# Altium PCB Audio_Docking_Station_PCB.PcbDoc
Units mm, origin at the board's own origin, x right, y up, seen from the top; angles counter-clockwise.
Board outline 70 x 100 mm, 2 copper layers (Top Layer, Bottom Layer); 31 components, 21 nets, 87 pads, 0 vias.
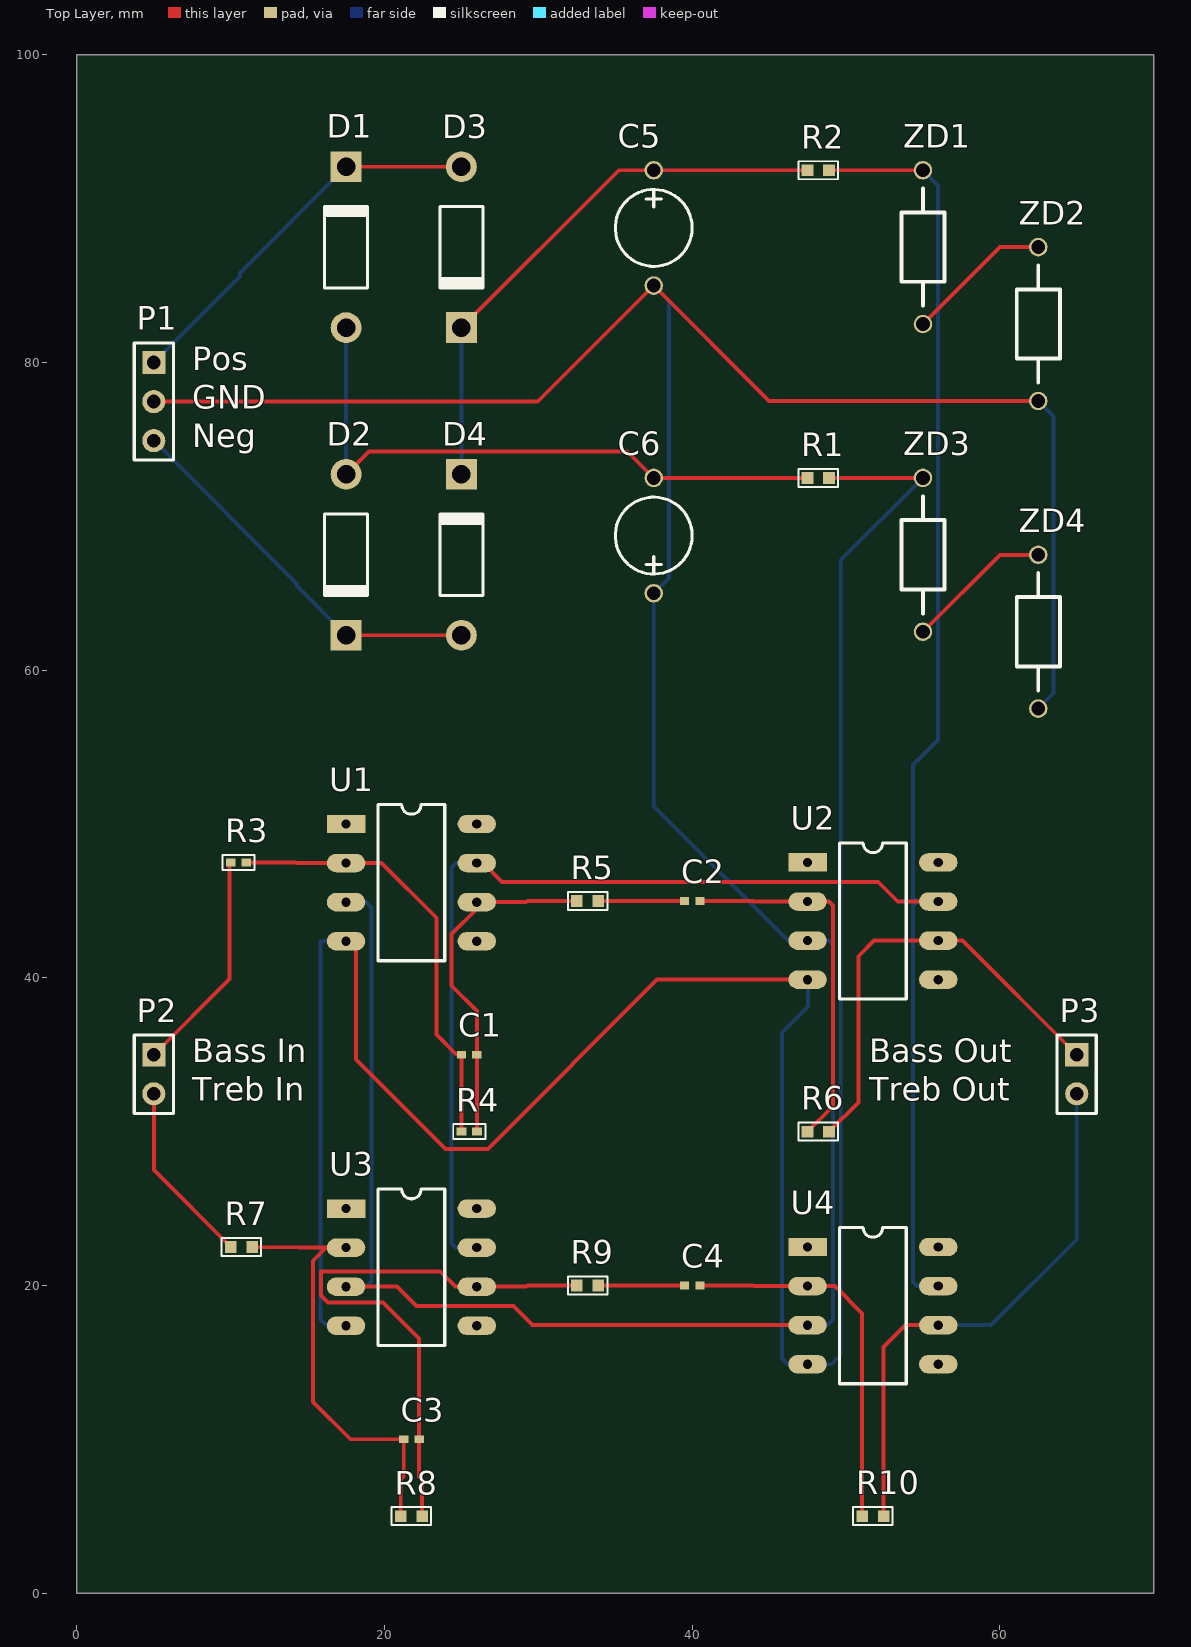
[diagram p0: Top Layer view]
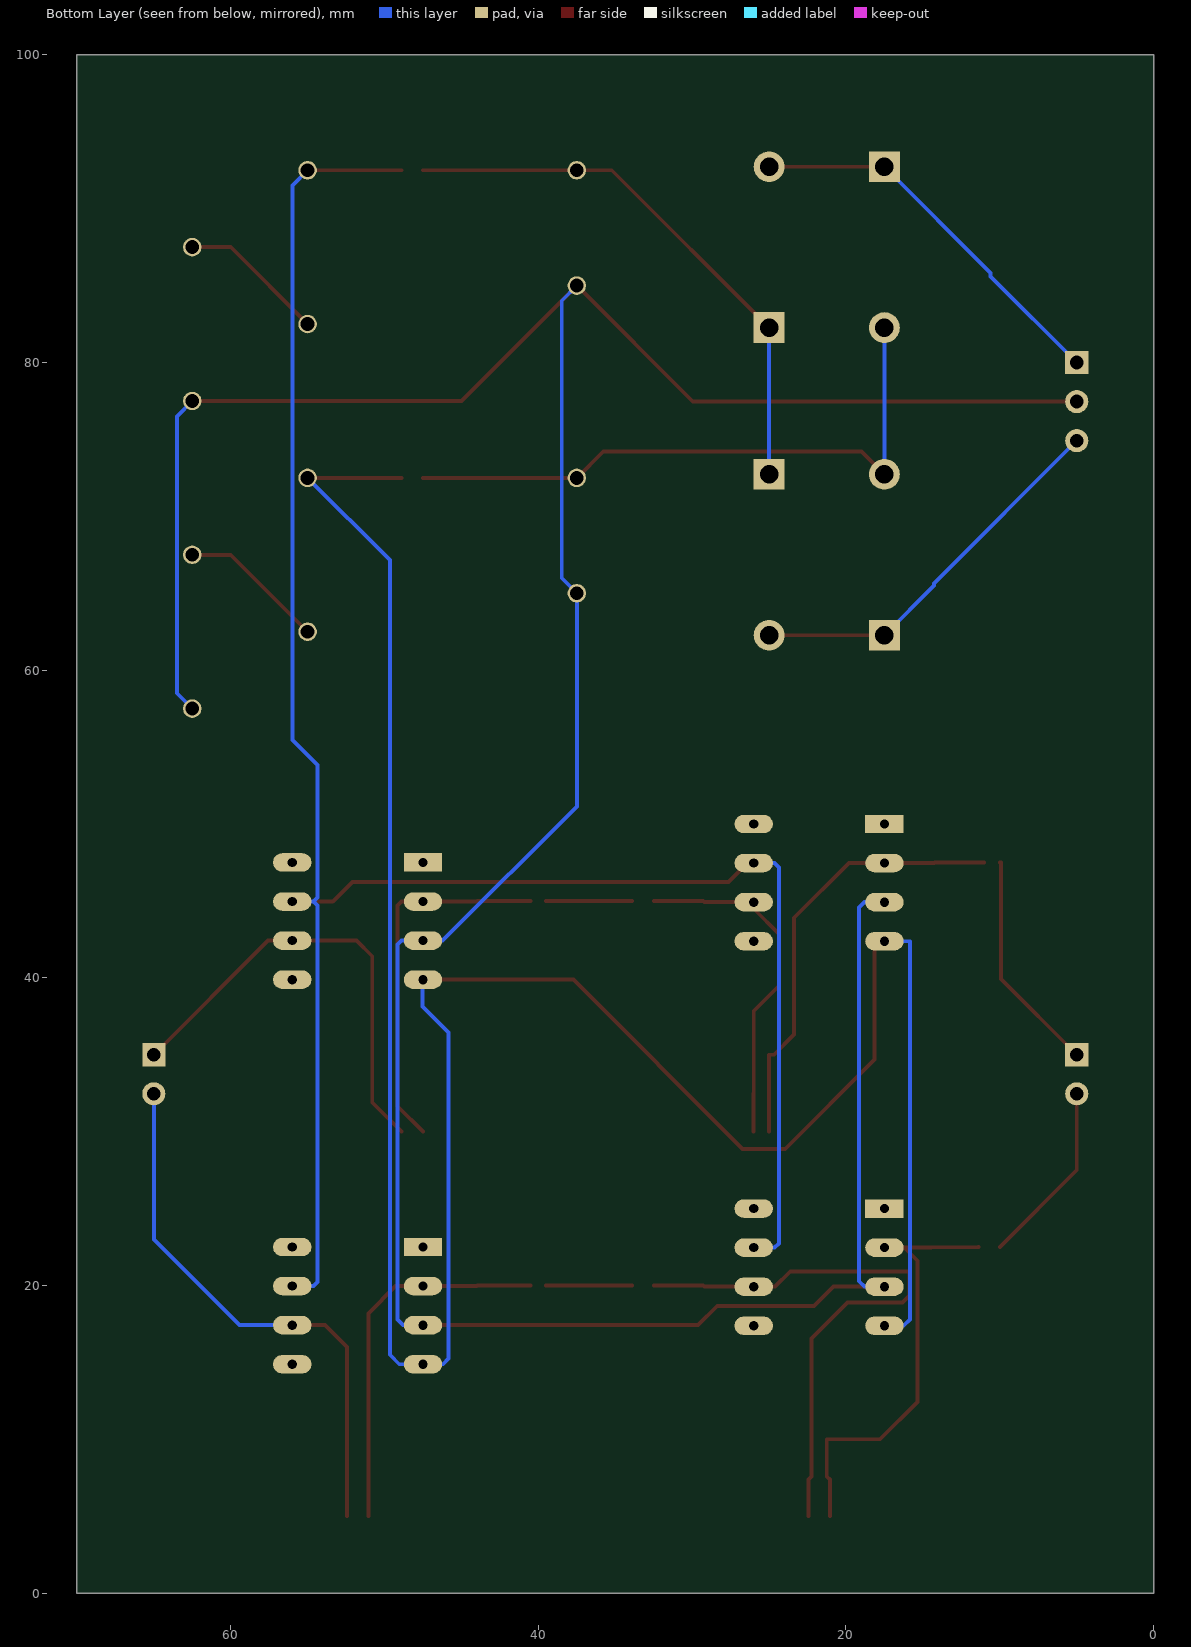
[diagram p1: Bottom Layer view, seen from below]

## Layer stack, top to bottom
Top Solder: solder mask 0.0102, Solder Resist, Dk 3.5
Top Layer: signal copper 0.0356
Dielectric1: dielectric 0.32, FR-4, Dk 4.8
Bottom Layer: signal copper 0.0356
Bottom Solder: solder mask 0.0102, Solder Resist, Dk 3.5

## Board outline
0,0 0,100 32.5,100 65,100 70,100 70,0

## Design rules (kind name [scope] priority, off if disabled: settings)
Clearance [All] p1: gap=0.254
FabricationTestPointUsage TestPointUsage [All] p1: valid=0 allowmultiple=FALSE
FabricationTestpoint Testpoint [All] p1: side=3 testpointundercomponent=TRUE minsize=1.016 maxsize=2.54 preferedsize=1.524 minholesize=0 maxholesize=1.016 preferedholesize=0.813 testpointgrid=0.025 allowsidetop=TRUE allowsidebottom=TRUE usegrid=TRUE gridtolerance=0
PolygonConnect [All] p1: connectstyle=Relief reliefconductorwidth=0.254 reliefentries=4 polygonreliefangle="90 Angle" airgapwidth=0.254
RoutingVias [All] p1: holewidth=0.711 width=1.27 viastyle="Through Hole" minholewidth=0.711 minwidth=1.27 maxholewidth=0.711 maxwidth=1.27
SilkToSolderMaskClearance SilkscreenOverComponentPads [IsPad] p1: minsilkscreentomaskgap=0.254 clearancetoexposedcopper=TRUE
SolderMaskExpansion [All] p1: expansion=0.102
Width [All] p1: maxlimit=0.254 minlimit=0.254 preferedwidth=0.254
27 further rules are at their usual default settings.

## Components (designator, comment, footprint, x,y, rotation, side; value= is the part's Value field where it differs from the comment)
C1 "Cap Semi" 0402 25.5,35 r0 top
C2 "Cap Semi" 0402 40,45 r0 top
C3 "Cap Semi" 0402 21.75,10 r0 top
C4 "Cap Semi" 0402 40,20 r0 top
C5 "2.2 mF Capacitor" "2.2mF Capacitor" 37.5,85 r90 top
C6 "2.2 mF Capacitor" "2.2mF Capacitor" 37.5,72.5 r270 top
D1 "Diode 1N4001" DO-41 17.5,87.5 r90 top
D2 "Diode 1N4001" DO-41 17.5,67.5 r270 top
D3 "Diode 1N4001" DO-41 25,87.5 r270 top
D4 "Diode 1N4001" DO-41 25,67.5 r90 top
P1 "Header 3" HDR1X3 5,80 r270 top
P2 "Header 2" HDR1X2 5,35 r270 top
P3 "Header 2" HDR1X2 65,35 r270 top
R1 "50 Ohm" 0603R-TBD 47.5,72.5 r0 top
R2 "50 Ohm" 0603R-TBD 47.5,92.5 r0 top
R3 "10k Ohm" 0402R-TBD 10,47.5 r0 top
R4 "10k Ohm" 0402R-TBD 25,30 r0 top
R5 "20k Ohm" 0603R-TBD 32.5,45 r0 top
R6 "20k Ohm" 0603R-TBD 47.5,30 r0 top
R7 "240k Ohm" 0603R-TBD 10,22.5 r0 top
R8 "240k Ohm" 0603R-TBD 21.051,5 r0 top
R9 "160k Ohm" 0603R-TBD 32.5,20 r0 top
R10 "240k Ohm" 0603R-TBD 51.051,5 r0 top
U1 "Op-Amp LM741" 8-DIP 17.5,50 r0 top
U2 "Op-Amp LM741" 8-DIP 47.5,47.5 r0 top
U3 "Op-Amp LM741" 8-DIP 17.5,25 r0 top
U4 "Op-Amp LM741" 8-DIP 47.5,22.5 r0 top
ZD1 "Diode 1N4733A" DO-41G 55,87.5 r90 top
ZD2 "Diode 1N4733A" DO-41G 62.5,82.5 r90 top
ZD3 "Diode 1N4733A" DO-41G 55,67.5 r270 top
ZD4 "Diode 1N4733A" DO-41G 62.5,62.5 r270 top

## Footprints (in the part's own frame and the unit in brackets; to place one, negate y for a bottom-side part, rotate by r counter-clockwise, add the part's x,y. Pads: shape width x height; smd on the part's side, far side on the other; paste and mask are expansions set on the pad)
"2.2mF Capacitor" [mm]
  round 1.2 hole 0.9: 1(0,0) 2(7.5,0)
  silkscreen extent 1.25,-2.5 6.25,2.5
8-DIP [mm]
  rect 2.5x1.2 hole 0.6: 1(0,0)
  oval 2.5x1.2 hole 0.6: 2(0,-2.54) 3(0,-5.08) 4(0,-7.62) 5(8.5,-7.62) 6(8.5,-5.08) 7(8.5,-2.54) 8(8.5,0)
  silkscreen extent 2.09,-8.89 6.42,1.27
0402 [mm] "Chip Capacitor, Body 1.0x0.5mm, IPC High Density"
  rect 0.6x0.5 smd: 1(-0.5,0) 2(0.5,0)
  body extent -0.55,-0.3 0.55,0.3, height 1.3
0402R-TBD [mil]
  rect 25x20 smd: 1(0,0) 2(40,0)
  silkscreen extent -21,-19 61,19, body extent -6,-10 46,10, height 14
0603R-TBD [mil] "RESISTOR 0603 VALUE TO BE DETERMINED"
  rect 30x30 smd: 1(0,0) 2(55,0)
  silkscreen extent -23,-23 78,23, body extent -4,-15 59,15, height 20
DO-41 [mm] "Diode, Axial; Body 5.2 x 2.7 mm (LxDia. max), Lead Dia. 0.86 mm (max)"
  round 2 hole 1.2: 1(-5.23,0)
  rect 2x2 hole 1.2: 2(5.23,0)
  silkscreen extent -2.65,-1.4 2.75,1.4
DO-41G [mm]
  round 1.2 hole 0.9: 1(-5,0) 2(5,0)
  silkscreen extent -3.81,-1.4 3.81,1.4
HDR1X2 [mm] "Connector; Header; 2 Position"
  rect 1.5x1.5 hole 0.9: 1(0,0)
  round 1.5 hole 0.9: 2(2.54,0)
  silkscreen extent -1.27,-1.27 3.81,1.27
HDR1X3 [mm] "Connector; Header; 3 Position"
  rect 1.5x1.5 hole 0.9: 1(0,0)
  round 1.5 hole 0.9: 2(2.54,0) 3(5.08,0)
  silkscreen extent -1.27,-1.27 6.35,1.27

## Part data
C1 C2 C3 C4: "Capacitor (Semiconductor SIM Model)"
D1 D2 D3 D4: "1 Amp General Purpose Rectifier"
P1: "Header, 3-Pin"
P2 P3: "Header, 2-Pin"
R1 R5 R6 R7 R8 R9 R10: library part 0603R-TBD, "RESISTOR 0603"
R2: library part 0603R-TBD, "RESISTOR 0603 VALUE TO BE DETERMINED"
R3 R4: library part 0402R-TBD

## Nets (pads, with @x,y where several pads share a name; then routed paths per layer and width w, separated by ;. In a path a pad name is that pad's centre, name@x,y a point inside that pad or via, vN(x,y) a via of type N, cw(c..) or ccw(c..) an arc to the next point about the centre after c; other vN are vias at no path point)
NetC1_1: C1.1 R3.2 R4.1 U1.2 | length 28.6
  Top Layer w0.254: R3.2 14.224,47.5 14.264,47.46 U1.2 19.812,47.46 23.369,43.903 23.369,36.322 24.691,35 C1.1 R4.1
NetC1_2: C1.2 R4.2 R5.1 U1.6 | length 22.8
  Top Layer w0.254: R4.2 26.016,32.487 26,32.503 C1.2 26,37.846 24.359,39.487 24.359,42.85 26,44.491 U1.6 29.21,44.92 29.29,45 R5.1
NetC2_1: C2.1 R5.2 | length 5.6
  Top Layer w0.254: R5.2 C2.1
NetC2_2: C2.2 R6.1 U2.2 | length 24.2
  Top Layer w0.254: C2.2 43.967,45 44.007,44.96 U2.2 48.893,44.96 49.149,44.704 49.149,31.649 R6.1
NetC3_1: C3.1 R7.2 R8.1 U3.2 | length 28.5
  Top Layer w0.254: R7.2 14.467,22.46 16.212,22.46 ; U3.2 16.212,22.46 ; R8.1 21.052,7.391 21.25,7.59 C3.1 17.78,10 15.361,12.419 15.361,21.609 16.212,22.46
NetC3_2: C3.2 R8.2 R9.1 U3.6 | length 37.8
  Top Layer w0.254: R8.2 22.449,7.391 22.25,7.59 C3.2 22.25,16.561 19.914,18.898 16.332,18.898 15.869,19.361 15.869,20.879 15.894,20.904 23.622,20.904 24.606,19.92 U3.6 29.21,19.92 29.29,20 R9.1
NetC4_1: C4.1 R9.2 | length 5.6
  Top Layer w0.254: R9.2 C4.1
NetC4_2: C4.2 R10.1 U4.2 | length 24.5
  Top Layer w0.254: C4.2 43.967,20 44.007,19.96 U4.2 49.276,19.96 51.052,18.184 R10.1
NetC5_1: C5.1 C6.2 P1.2 U1.3 U2.3 U3.3 U4.3 ZD2.1 ZD4.2 | length 219.7
  Top Layer w0.254: P1.2 29.96,77.46 C5.1 45,77.5 ZD2.1 ; U3.3 20.822,19.92 22.073,18.669 28.372,18.669 29.621,17.42 U4.3
  Bottom Layer w0.254: U3.3 18.796,19.92 19.152,20.276 19.152,44.564 18.796,44.92 U1.3 ; C5.1 38.481,84.019 38.481,65.981 C6.2 37.5,51.148 46.228,42.42 U2.3 48.893,42.42 49.149,42.164 49.149,17.78 48.789,17.42 U4.3 ; ZD4.2 63.5,58.5 63.5,76.5 ZD2.1
NetC5_2: C5.2 D3.2 D4.2 R2.1 | length 36.3
  Top Layer w0.254: D3.2 35.23,92.5 C5.2 R2.1
  Bottom Layer w0.254: D4.2 D3.2
NetC6_1: C6.1 D1.1 D2.1 R1.1 | length 40.9
  Top Layer w0.254: D2.1 18.989,74.219 35.781,74.219 C6.1 R1.1
  Bottom Layer w0.254: D2.1 D1.1
NetD1_2: D1.2 D3.1 P1.1 | length 25.4
  Top Layer w0.254: D1.2 D3.1
  Bottom Layer w0.254: P1.1 10.597,85.597 10.597,85.827 D1.2
NetD2_2: D2.2 D4.1 P1.3 | length 25.3
  Top Layer w0.254: D2.2 D4.1
  Bottom Layer w0.254: P1.3 14.275,65.645 14.275,65.495 D2.2
NetP2_1: P2.1 R3.1 | length 14.6
  Top Layer w0.254: P2.1 9.931,39.931 9.931,47.5 R3.1
NetP2_2: P2.2 R7.1 | length 12
  Top Layer w0.254: P2.2 5,27.5 R7.1
NetP3_1: P3.1 R6.2 U2.6 | length 29.9
  Top Layer w0.254: R6.2 50.8,31.903 50.8,41.402 51.818,42.42 U2.6 57.58,42.42 P3.1
NetP3_2: P3.2 R10.2 U4.6 | length 35.9
  Top Layer w0.254: R10.2 52.449,16 53.869,17.42 U4.6
  Bottom Layer w0.254: U4.6 59.436,17.42 65,22.984 P3.2
NetR1_2: R1.2 U1.4 U2.4 U3.4 U4.4 ZD3.1 | length 167.6
  Top Layer w0.254: U1.4 18.136,42.38 18.136,34.696 23.952,28.88 26.721,28.88 37.721,39.88 U2.4 ; R1.2 ZD3.1
  Bottom Layer w0.254: U3.4 16.25,17.38 15.85,17.78 15.85,42.38 U1.4 ; U2.4 47.523,39.88 47.523,38.125 45.847,36.449 45.847,15.24 46.207,14.88 U4.4 49.043,14.88 49.657,15.494 49.657,67.157 ZD3.1
NetR2_2: R2.2 U1.7 U2.7 U3.7 U4.7 ZD1.2 | length 141.8
  Top Layer w0.254: U1.7 26.416,47.46 27.648,46.228 52.095,46.228 53.363,44.96 U2.7 ; R2.2 ZD1.2
  Bottom Layer w0.254: U3.7 24.638,22.46 24.359,22.739 24.359,47.181 24.638,47.46 U1.7 ; ZD1.2 55.982,91.518 55.982,55.448 54.356,53.823 54.356,45.214 54.61,44.96 ; U4.7 54.61,19.96 54.356,20.214 54.356,44.706 54.61,44.96 ; U2.7 54.61,44.96
NetZD1_1: ZD1.1 ZD2.2 | length 9.6
  Top Layer w0.254: ZD1.1 60,87.5 ZD2.2
NetZD3_2: ZD3.2 ZD4.1 | length 9.6
  Top Layer w0.254: ZD3.2 60,67.5 ZD4.1
pads on no net: U1.1 U1.5 U1.8 U2.1 U2.5 U2.8 U3.1 U3.5 U3.8 U4.1 U4.5 U4.8

## Silkscreen, mask and mechanical layers (free items; w line width, h text height)
Top Overlay:
  text "Pos" at 7.5,79.5 h1.52
  text "GND" at 7.5,77 h1.52
  text "Neg" at 7.5,74.5 h1.52
  text "Bass In" at 7.5,34.5 h1.52
  text "Bass Out" at 51.5,34.5 h1.52
  text "Treb In" at 7.5,32 h1.52
  text "Treb Out" at 51.5,32 h1.52
Mechanical 16:
  drawing of 1874 lines, arcs and shapes, not listed
  text "1" at -29.286,135.509 h1.78
  text "2" at 43.358,135.509 h1.78
  text "3" at 116.51,135.509 h1.78
  text "4" at 189.408,135.509 h1.78
  text "A" at -63.627,112.497 h1.78
  text "A" at 223.393,112.497 h1.78
  text "C" at -8.607,110.051 h1.78
  text "B" at -63.627,64.44 h1.78
  text "B" at 223.393,64.44 h1.78
  text "C" at -63.627,15.926 h1.78
  text "ENGINEER:" at 108.458,-21.082 h1.14
  text "TITLE:" at 146.558,-21.082 h1.14
  text "PCB DESIGNER:" at 108.458,-28.575 h1.14
  text "D" at -63.627,-32.08 h1.78
  text "D" at 223.393,-32.08 h1.78
  text "DATE:" at 108.458,-36.322 h1.14
  text "PART NO.:" at 146.558,-36.322 h1.14
  text "REV:" at 199.898,-36.322 h1.14
  text "Altium Limited" at 75.438,-38.862 h1.78
  text ".PRINT_DATE" at 109.728,-39.37 h1.78
  text "12a Rodborough Rd" at 75.438,-41.402 h1.78
  text "Frenchs Forest" at 75.438,-43.942 h1.78
  text "FILE NAME:" at 108.458,-43.942 h1.14
  text "DWG NO:" at 146.558,-43.942 h1.14
  text "SCALE:" at 199.898,-43.942 h1.14
  text "NSW 2086" at 75.438,-46.482 h1.78
  text ".PCB_FILE_NAME_NO_PATH" at 109.728,-46.99 h1.78
  text "1" at -29.286,-52.451 h1.78
  text "2" at 43.358,-52.451 h1.78
  text "3" at 116.51,-52.451 h1.78
  text "4" at 189.408,-52.451 h1.78